# EAGLE board LTC_Balancer2 (EAGLE 5.06)
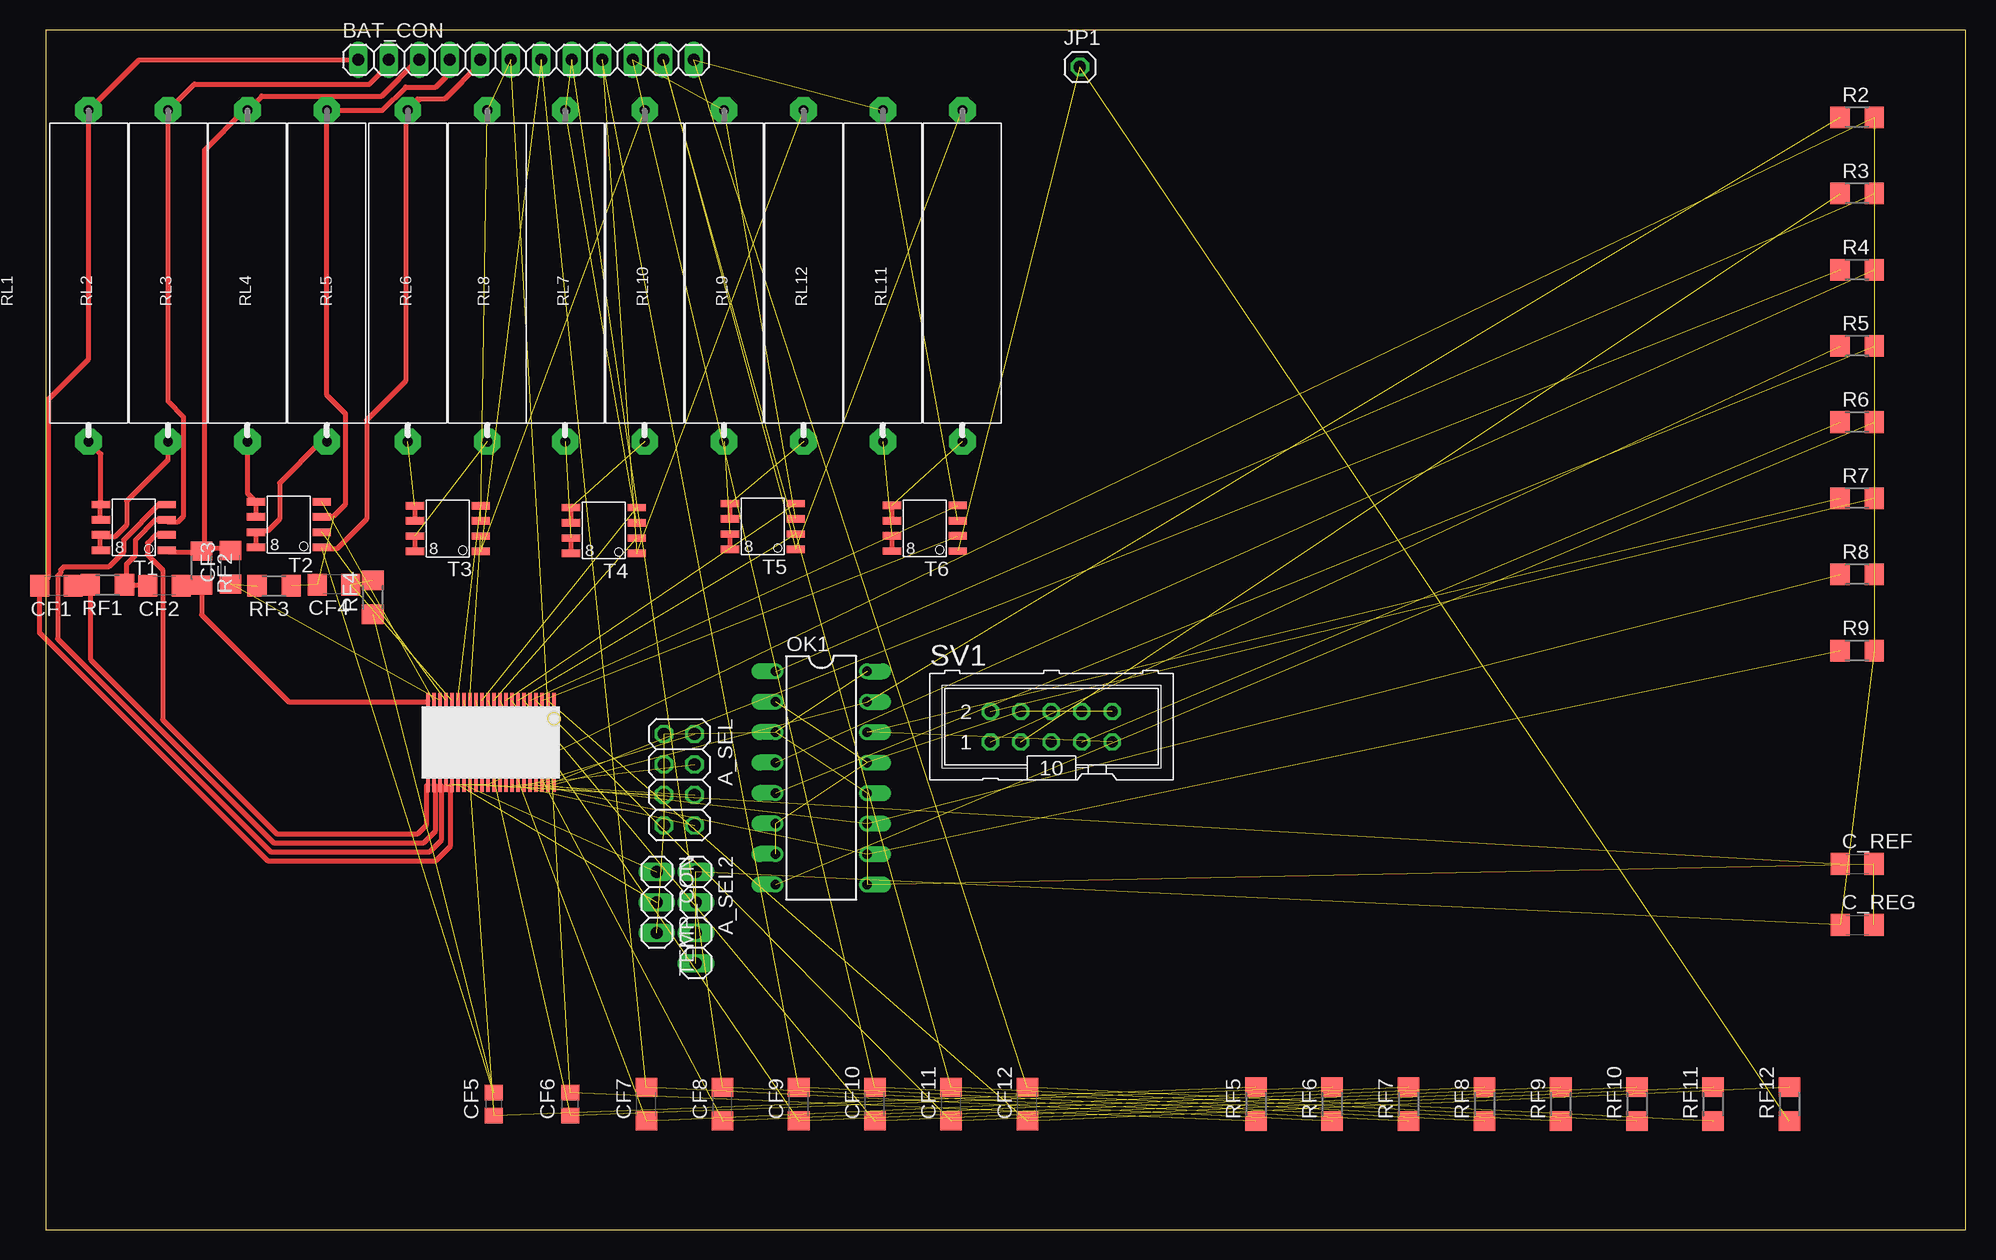
[diagram p0: board, top side]

Size 160 x 100 mm. Coordinates in mm from the lower left corner, seen from the top.
Outline: 0,0 160,0 160,100 0,100 0,0
Copper layers (1*16): Top 0.035mm / dielectric 1.5mm / Bottom 0.035mm
Design rules "default": minimum track width 10mil, minimum drill 24mil, track to track 8mil, track to pad 8mil, pad to pad 8mil, via to via 8mil, smd to smd 8mil, copper to edge 40mil, drill to drill 8mil, minimum pad ring 10mil, minimum via ring 8mil, stop-mask expansion 4mil, vias tented up to drill 0mil, thermal gap 10mil

## Footprints (pad centres in the part's own frame; a part is rotated, then mirrored left to right if it is on the bottom)
2X04 = drill 1.016 octagon: 1 -3.81,-1.27; 2 -3.81,1.27; 3 -1.27,-1.27; 4 -1.27,1.27; 5 1.27,-1.27; 6 1.27,1.27; 7 3.81,-1.27; 8 3.81,1.27
1X04 = drill 1.016 long: 1 -3.81,0; 2 -1.27,0; 3 1.27,0; 4 3.81,0
1X12 = drill 1.016 long: 1 -13.97,0; 2 -11.43,0; 3 -8.89,0; 4 -6.35,0; 5 -3.81,0; 6 -1.27,0; 7 1.27,0; 8 3.81,0; 9 6.35,0; 10 8.89,0; 11 11.43,0; 12 13.97,0
C1206 = smd 1.6 x 1.8: 1 -1.4,0; 2 1.4,0
C0805 = smd 1.3 x 1.5: 1 -0.95,0; 2 0.95,0
1X01 = drill 1.016 octagon: 1 0,0
DIL16 = drill 0.813 offset: 1 -8.89,-3.81; 2 -6.35,-3.81; 3 -3.81,-3.81; 4 -1.27,-3.81; 5 1.27,-3.81; 6 3.81,-3.81; 7 6.35,-3.81; 8 8.89,-3.81; 9 8.89,3.81; 10 6.35,3.81; 11 3.81,3.81; 12 1.27,3.81; 13 -1.27,3.81; 14 -3.81,3.81; 15 -6.35,3.81; 16 -8.89,3.81
R1206 = smd 1.6 x 1.803: 1 -1.422,0; 2 1.422,0
R_5W = drill 0.813 pad 2.184 octagon: 1 0.46,0; 2 28.08,0
ML10 = drill 0.914 octagon: 1 -5.08,-1.27; 2 -5.08,1.27; 3 -2.54,-1.27; 4 -2.54,1.27; 5 0,-1.27; 6 0,1.27; 7 2.54,-1.27; 8 2.54,1.27; 9 5.08,-1.27; 10 5.08,1.27
SO8 = smd 1.524 x 0.61: 1 1.067,4.445; 2 1.067,3.175; 3 1.067,1.905; 4 1.067,0.635; 5 6.553,0.635; 6 6.553,1.905; 7 6.553,3.175; 8 6.553,4.445
1X03 = drill 1.016 long: 1 -2.54,0; 2 0,0; 3 2.54,0
SSOP48 = smd 0.3 x 1.25: P$1 0,0.5; P$2 0.5,0.5; P$3 1,0.5; P$4 1.5,0.5; P$5 2,0.5; P$6 2.5,0.5; P$7 3,0.5; P$8 3.5,0.5; P$9 4,0.5; P$10 4.5,0.5; P$11 5,0.5; P$12 5.5,0.5; P$13 6,0.5; P$14 6.5,0.5; P$15 7,0.5; P$16 7.5,0.5; P$17 8,0.5; P$18 8.5,0.5; P$19 9,0.5; P$20 9.5,0.5; P$21 10,0.5; P$22 10.5,0.5; P$23 10.5,7.5; P$24 10,7.5; P$25 9.5,7.5; P$26 9,7.5; P$27 8.5,7.5; P$28 8,7.5; P$29 7.5,7.5; P$30 7,7.5; P$31 6.5,7.5; P$32 6,7.5; P$33 5.5,7.5; P$34 5,7.5; P$35 4.5,7.5; P$36 4,7.5; P$37 3.5,7.5; P$38 3,7.5; P$39 2.5,7.5; P$40 2,7.5; P$41 1.5,7.5; P$42 1,7.5; P$43 0.5,7.5; P$44 0,7.5

## Placement (x,y rotation side)
A_SEL  [2X04]  52.81,37.5 270 top
A_SEL2  [1X04]  54.19,26 270 top
BAT_CON  [1X12]  40.03,97.52 0 top
C_REF  1u  [C1206]  150.96,30.48 0 top
C_REG  1u  [C1206]  150.96,25.4 0 top
CF1  100n  [C1206]  0.9,53.66 180 top
CF2  100n  [C1206]  9.9,53.67 180 top
CF3  100n  [C1206]  15.41,55.21 90 top
CF4  100n  [C1206]  24.04,53.76 180 top
CF5  100n  [C0805]  37.36,10.46 90 top
CF6  100n  [C0805]  43.71,10.46 90 top
CF7  100n  [C1206]  50.06,10.46 90 top
CF8  100n  [C1206]  56.41,10.46 90 top
CF9  100n  [C1206]  62.76,10.46 90 top
CF10  100n  [C1206]  69.11,10.46 90 top
CF11  100n  [C1206]  75.46,10.46 90 top
CF12  100n  [C1206]  81.81,10.46 90 top
JP1  [1X01]  86.19,96.91 0 top
OK1  ILQ1  [DIL16]  64.64,37.65 270 top
R2  1k8  [R1206]  150.96,92.71 0 top
R3  910  [R1206]  150.96,86.36 0 top
R4  910  [R1206]  150.96,80.01 0 top
R5  910  [R1206]  150.96,73.66 0 top
R6  910  [R1206]  150.96,67.31 0 top
R7  1k8  [R1206]  150.96,60.96 0 top
R8  1k8  [R1206]  150.96,54.61 0 top
R9  1k8  [R1206]  150.96,48.26 0 top
RF1  100  [R1206]  5.15,53.74 180 top
RF2  100  [R1206]  13,55.15 270 top
RF3  100  [R1206]  19.04,53.66 180 top
RF4  100  [R1206]  27.26,52.71 90 top
RF5  100  [R1206]  100.86,10.46 90 top
RF6  100  [R1206]  107.21,10.46 90 top
RF7  100  [R1206]  113.56,10.46 90 top
RF8  100  [R1206]  119.91,10.46 90 top
RF9  100  [R1206]  126.26,10.46 90 top
RF10  100  [R1206]  132.61,10.46 90 top
RF11  100  [R1206]  138.96,10.46 90 top
RF12  100  [R1206]  145.31,10.46 90 top
RL1  R_5W  [R_5W]  3.58,65.23 90 top
RL2  R_5W  [R_5W]  10.2,65.23 90 top
RL3  R_5W  [R_5W]  16.82,65.23 90 top
RL4  R_5W  [R_5W]  23.44,65.23 90 top
RL5  R_5W  [R_5W]  30.18,65.23 90 top
RL6  R_5W  [R_5W]  36.81,65.23 90 top
RL7  R_5W  [R_5W]  49.92,65.23 90 top
RL8  R_5W  [R_5W]  43.3,65.23 90 top
RL9  R_5W  [R_5W]  63.16,65.23 90 top
RL10  R_5W  [R_5W]  56.54,65.23 90 top
RL11  R_5W  [R_5W]  76.4,65.23 90 top
RL12  R_5W  [R_5W]  69.78,65.23 90 top
SV1  [ML10]  83.82,41.91 0 top
T1  IRF_7104  [SO8]  11.16,61.08 180 top
T2  IRF_7104  [SO8]  24.08,61.31 180 top
T3  IRF_7104  [SO8]  37.33,60.98 180 top
T4  IRF_7104  [SO8]  50.33,60.82 180 top
T5  IRF_7104  [SO8]  63.58,61.16 180 top
T6  IRF_7104  [SO8]  77.08,61 180 top
TEMP_CON  [1X03]  50.93,27.27 270 top
U$1  LTC6802-2  [SSOP48]  42.36,44.59 180 top

## Library data of the parts
A_SEL A_SEL2 BAT_CON JP1 TEMP_CON = pinhead
C_REF C_REG CF1-CF12 R2-R9 RF1-RF12 = rcl
OK1 = optocoupler
RL1-RL12 = R_Power
SV1 = con-ml
T1-T6 = IRF_7104
U$1 = LTC6802

## Nets
+5V: R7.2 SV1.2
A0: A_SEL.8 U$1.P$37
A1: A_SEL.6 U$1.P$38
A2: A_SEL.4 U$1.P$39
A3: A_SEL.2 U$1.P$40
ASD: RL5.1 T3.5
BK2: BAT_CON.2 CF2.2 RF1.1 RL2.2 T1.3
BK3: BAT_CON.3 CF3.2 RF2.1 RL3.2 T1.1
BK4: BAT_CON.4 CF4.2 RF3.1 RL4.2 T2.3
BK5: BAT_CON.5 CF5.2 RF4.1 RL5.2 T2.1
BK6: BAT_CON.6 CF6.2 RF5.1 RL6.2 T3.3
BK7: BAT_CON.7 CF7.2 RF6.1 RL7.2 T3.1
BK8: BAT_CON.8 CF8.2 RF7.1 RL8.2 T4.3
BK9: BAT_CON.9 CF9.2 RF8.1 RL9.2 T4.1
BK10: BAT_CON.10 CF10.2 RF9.1 RL10.2 T5.3
BK11: BAT_CON.11 CF11.2 RF10.1 RL11.2 T5.1
BK12: BAT_CON.12 CF12.2 RF11.1 RL12.2 T6.3
C1: CF1.1 RF1.2 U$1.P$24
C2: CF2.1 RF2.2 U$1.P$22
C3: CF3.1 RF3.2 U$1.P$20
C4: CF4.1 RF4.2 U$1.P$18
C5: CF5.1 RF5.2 U$1.P$16
C6: CF6.1 RF6.2 U$1.P$14
C7: CF7.1 RF7.2 U$1.P$12
C8: CF8.1 RF8.2 U$1.P$10
C9: CF9.1 RF9.2 U$1.P$8
C10: CF10.1 RF10.2 U$1.P$6
C11: CF11.1 RF11.2 U$1.P$4
C12: CF12.1 RF12.2 U$1.P$2
CS: R3.1 SV1.3
CSBI: OK1.15 R2.1 U$1.P$44
GND: OK1.2 OK1.6 OK1.7 OK1.13 SV1.4 SV1.6 SV1.8 SV1.10
MISO: OK1.14 R7.1 SV1.9
MOSI: R5.1 SV1.1
N$1: OK1.1 R3.2
N$2: TEMP_CON.1 U$1.P$29
N$3: C_REF.1 U$1.P$30
N$4: TEMP_CON.2 U$1.P$28
N$5: RL3.1 T2.5
N$6: RL4.1 T2.7
N$8: RL1.1 T1.5
N$9: RL2.1 T1.7
N$10: RL6.1 T3.7
N$11: RL7.1 T4.5
N$12: RL8.1 T4.7
N$13: RL9.1 T5.5
N$14: RL10.1 T5.7
N$15: RL11.1 T6.5
N$16: RL12.1 T6.7
N$19: OK1.4 R4.2
N$20: OK1.5 R5.2
N$21: OK1.8 R6.2
S1: T1.4 U$1.P$25
S2: T1.2 U$1.P$23
S3: T2.4 U$1.P$21
S4: T2.2 U$1.P$19
S5: T3.4 U$1.P$17
S6: T3.2 U$1.P$15
S7: T4.4 U$1.P$13
S8: T4.2 U$1.P$11
S9: T5.4 U$1.P$9
S10: T5.2 U$1.P$7
S11: T6.4 U$1.P$5
S12: T6.2 U$1.P$3
SCK: R6.1 SV1.7
SCKI: OK1.10 R9.1 U$1.P$41
SDI: OK1.11 R8.1 U$1.P$42
SDO: R4.1 U$1.P$43
V+: JP1.1 RF12.1 T6.1
V-: A_SEL.1 A_SEL.3 A_SEL.5 A_SEL.7 BAT_CON.1 C_REF.2 C_REG.2 CF1.2 OK1.3 OK1.9 OK1.12 OK1.16 RL1.2 TEMP_CON.3 U$1.P$26 U$1.P$27 U$1.P$32
VCC: A_SEL2.1 A_SEL2.2 A_SEL2.3 A_SEL2.4 C_REG.1 R2.2 R8.2 R9.2 U$1.P$31 U$1.P$33

## Tracks (layer width: path | path; a pad name or v marks a point on that pad's centre or on a via)
+5V  (1 unrouted)
A0  (1 unrouted)
A1  (1 unrouted)
A2  (1 unrouted)
A3  (1 unrouted)
ASD  (1 unrouted)
BK2
  Top 0.406: BAT_CON.2 28.6,97.1 27,95.5 12.39,95.5 RL2.2 10.2,69.05 11.5,67.75 11.5,59.5 11,59 10.17,59 T1.3 9.18,59.17 7.5,57.5 7.5,56.25 6.75,55.5 6.75,54.67 RF1.1 8.43,53.74 CF2.2
BK3
  Top 0.406: BAT_CON.3 31.02,97.52 28,94.5 18.01,94.5 RL3.2 16.56,93.31 13.25,90 13.25,56.82 | T1.1 10.21,56.5 12.93,56.5 RF2.1 13.25,56.82 | 13.25,56.82 15.41,56.82 CF3.2
BK4  (2 unrouted)
  Top 0.406: 22.92,59.5 T2.3 23.11,59.5 24,59.5 25,60.5 25,68 23.44,69.56 RL4.2 28.06,93.31 30,95.25 32.5,95.25 33.5,96.25 33.5,97.34 BAT_CON.4
BK5  (2 unrouted)
  Top 0.406: 31.25,94.25 31.12,94.25 RL5.2 | BAT_CON.5 36.22,97.22 33.25,94.25 31.25,94.25 | 31.25,94.25 31,94.25 30,93.25 30,70.75 26.75,67.5 26.75,59.25 24.25,56.75 23.13,56.75 T2.1
BK6  (4 unrouted)
BK7  (4 unrouted)
BK8  (4 unrouted)
BK9  (4 unrouted)
BK10  (4 unrouted)
BK11  (4 unrouted)
BK12  (4 unrouted)
C1
  Top 0.406: CF1.1 3.65,53.66 RF1.2 3.73,47.52 19,32.25 31.5,32.25 32.5,33.25 32.5,36.95 U$1.P$24
C2
  Top 0.406: CF2.1 11.42,53.67 11.5,53.75 12.98,53.75 RF2.2 13,51.25 20.25,44 31.77,44 U$1.P$22
C3  (2 unrouted)
C4  (2 unrouted)
C5  (2 unrouted)
C6  (2 unrouted)
C7  (2 unrouted)
C8  (2 unrouted)
C9  (2 unrouted)
C10  (2 unrouted)
C11  (2 unrouted)
C12  (2 unrouted)
CS  (1 unrouted)
CSBI  (2 unrouted)
GND  (7 unrouted)
MISO  (2 unrouted)
MOSI  (1 unrouted)
N$1  (1 unrouted)
N$2  (1 unrouted)
N$3  (1 unrouted)
N$4  (1 unrouted)
N$5
  Top 0.406: RL3.1 16.82,61.38 T2.5
N$6
  Top 0.406: RL4.1 22.94,65.69 19.5,62.25 19.5,59.25 18.5,58.25 17.64,58.25 T2.7
N$7
  Top 0.406: 4.5,60.5 4.5,59.25
N$8
  Top 0.406: T1.5 4.61,64.66 RL1.1
N$9
  Top 0.406: RL2.1 10.2,64.2 6.75,60.75 6.75,58.75 5.75,57.75 4.7,57.75 T1.7
N$10  (1 unrouted)
N$11  (1 unrouted)
N$12  (1 unrouted)
N$13  (1 unrouted)
N$14  (1 unrouted)
N$15  (1 unrouted)
N$16  (1 unrouted)
N$18
  Top 0.406: 4.5,58 4.5,56.75
N$19  (1 unrouted)
N$20  (1 unrouted)
N$21  (1 unrouted)
N$22
  Top 0.406: 17.5,60.75 17.5,59.5
N$23
  Top 0.406: 17.5,58.25 17.5,56.75
N$24
  Top 0.406: 30.75,60.25 30.75,59.25
N$25
  Top 0.406: 30.75,57.75 30.75,56.5
N$26
  Top 0.406: 43.75,60.25 43.75,59
N$27
  Top 0.406: 43.75,57.5 43.75,56.5
N$28
  Top 0.406: 57,60.5 57,59.25
N$29
  Top 0.406: 57,58 57,56.75
N$30
  Top 0.406: 70.5,60.25 70.5,59.25
N$31
  Top 0.406: 70.5,57.75 70.5,56.5
S1
  Top 0.406: T1.4 9.45,60.45 6.5,57.5 6.5,56.5 5.25,55.25 1.5,55.25 1.25,55 1.25,54.75 1,54.5 1,49.25 18.75,31.5 32,31.5 33,32.5 33,36.95 U$1.P$25
S2
  Top 0.406: T1.2 9.15,57.91 8.5,57.25 8.5,56.25 9.75,55 9.75,42.5 19.25,33 31,33 31.75,33.75 31.75,36.98 U$1.P$23
S3  (1 unrouted)
S4  (1 unrouted)
S5  (1 unrouted)
S6  (1 unrouted)
S7  (1 unrouted)
S8  (1 unrouted)
S9  (1 unrouted)
S10  (1 unrouted)
S11  (1 unrouted)
S12  (1 unrouted)
SCK  (1 unrouted)
SCKI  (2 unrouted)
SDI  (2 unrouted)
SDO  (1 unrouted)
V+  (2 unrouted)
V-  (13 unrouted)
  Top 0.406: BAT_CON.1 7.79,97.52 RL1.2 3.58,72.58 0.25,69.25 0.25,54.41 CF1.2 -0.5,49.75 18.5,30.75 32.5,30.75 33.75,32 33.75,36.98 U$1.P$27
VCC  (9 unrouted)